# Altium PCB PM-1_motorDriverModule.PcbDoc
Units mm, origin at the board's own origin, x right, y up, seen from the top; angles counter-clockwise.
Board outline 87 x 53.25 mm, 2 copper layers (Top Layer, Bottom Layer); 82 components, 55 nets, 281 pads, 281 vias.
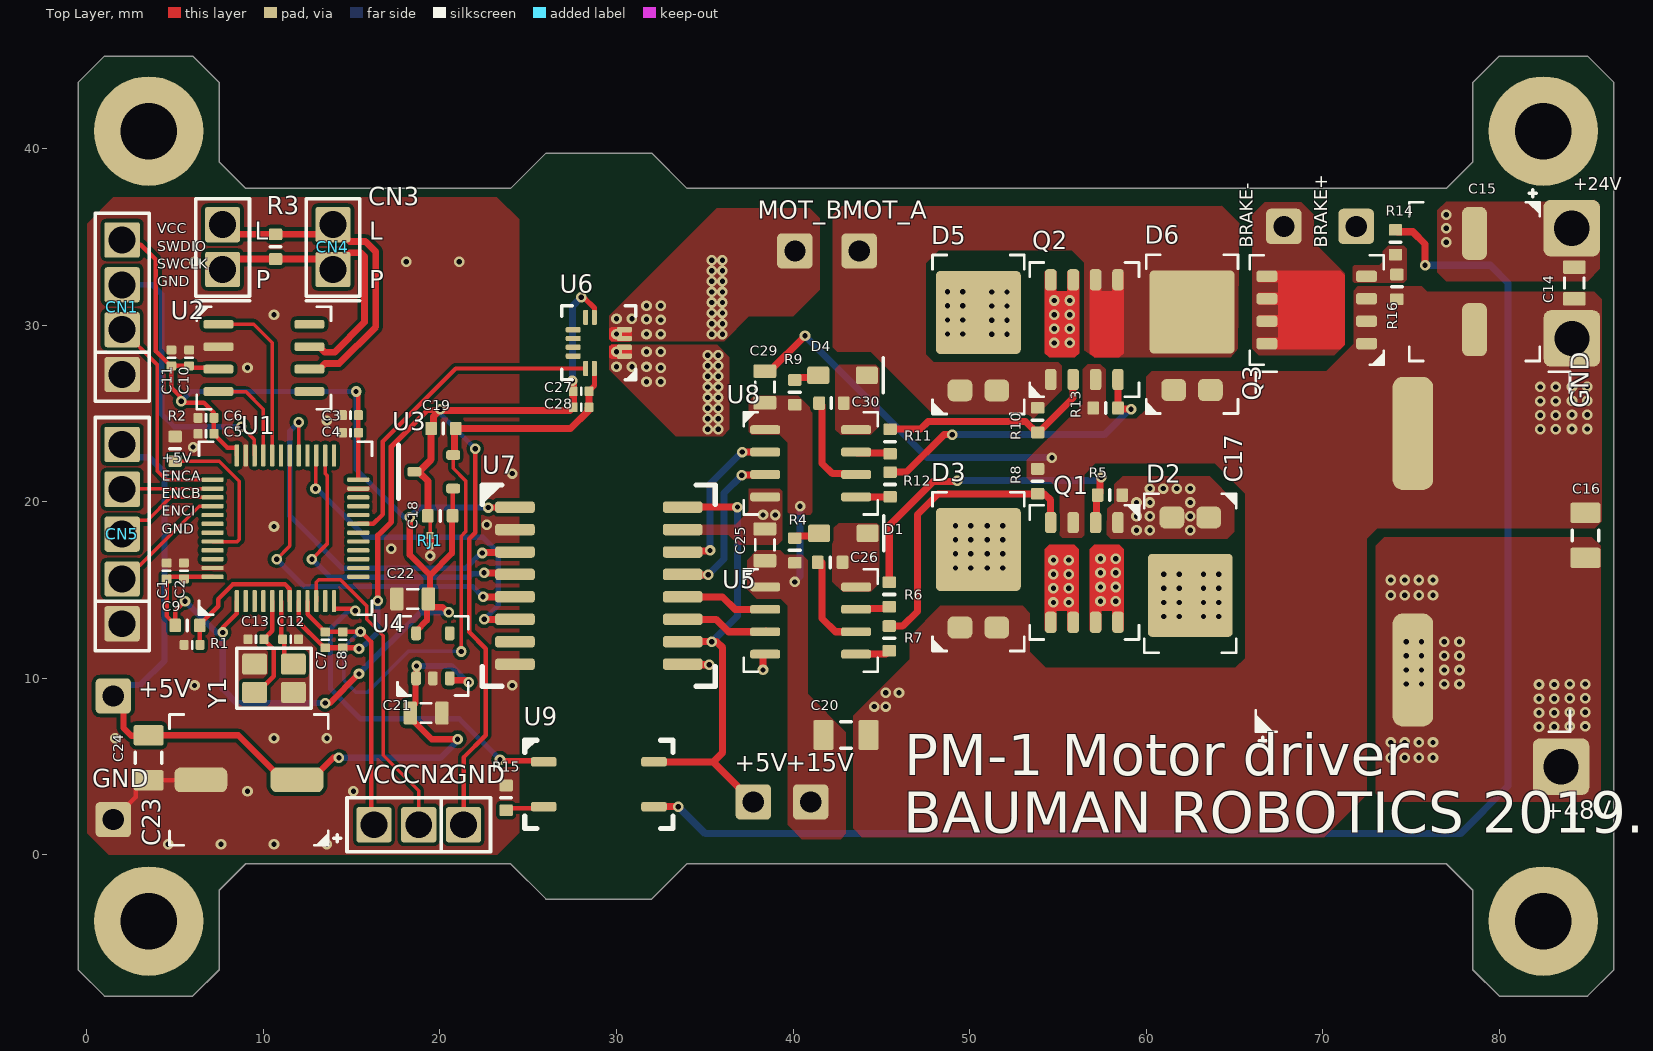
[diagram p0: Top Layer view]
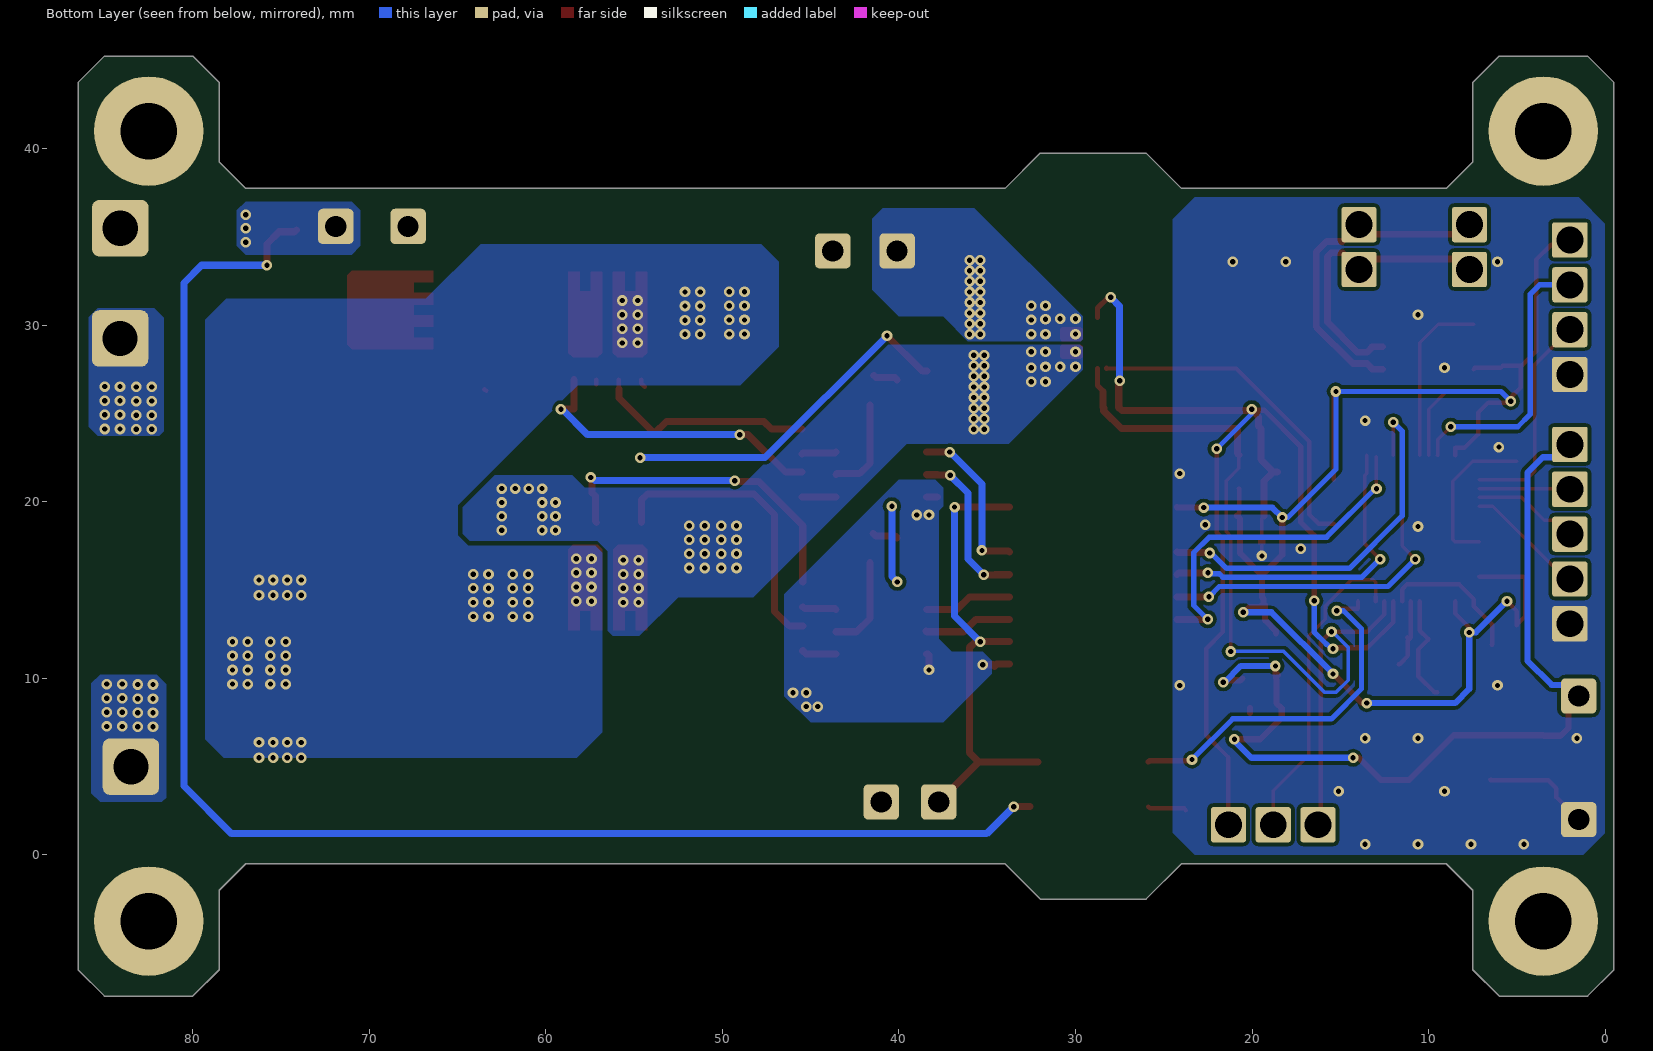
[diagram p1: Bottom Layer view, seen from below]
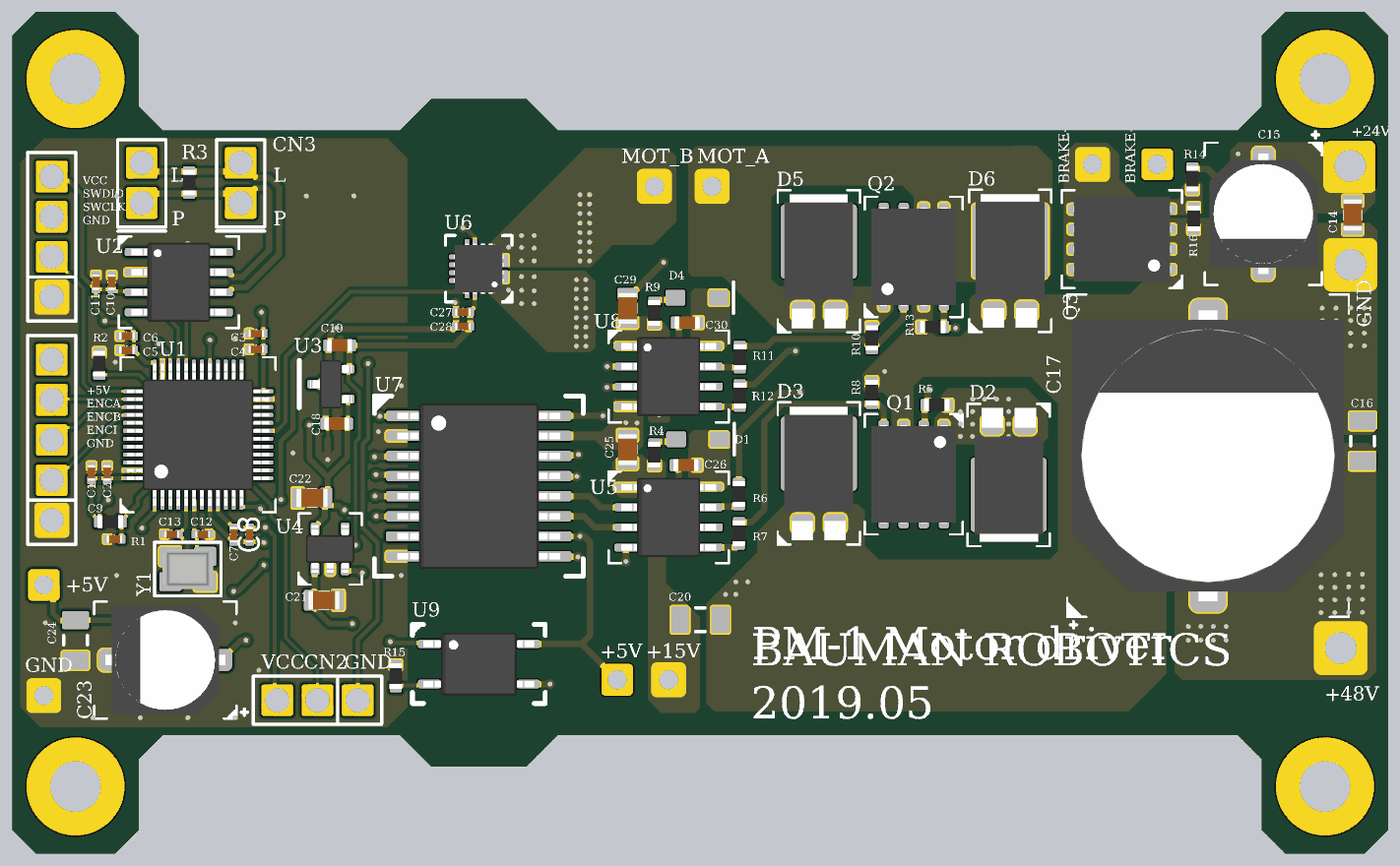
[diagram p2: 3D render of the assembled board from above, using the file's embedded part models]

## Layer stack, top to bottom
Top Solder: solder mask 0.0102, Solder Resist, Dk 3.5
Top Layer: signal copper 0.0356
Dielectric 1: dielectric 0.32, FR-4, Dk 4.8
Bottom Layer: signal copper 0.0356
Bottom Solder: solder mask 0.0102, Solder Resist, Dk 3.5

## Board outline
-0.5,-6.5 1,-8 6,-8 7.5,-6.5 7.5,-2 9,-0.5 24,-0.5 26,-2.5 32,-2.5 34,-0.5 77,-0.5 78.5,-2 78.5,-6.5 80,-8 85,-8 86.5,-6.5 86.5,43.75 85,45.25 80,45.25 78.5,43.75 78.5,39.25 77,37.75 34,37.75 32,39.75 26,39.75 24,37.75 9,37.75 7.5,39.25 7.5,43.75 6,45.25 1,45.25 -0.5,43.75

## Design rules (kind name [scope] priority, off if disabled: settings)
BoardOutlineClearance [All] p1: gap=0.5 ignorepadtopadclearanceinfootprint=FALSE except(0: Arc-SplitContinuation Track-SplitContinuation SMDPad-SplitContinuation THPad-SplitContinuation Via-SplitContinuation Fill-SplitContinuation Poly-SplitContinuation Region-SplitContinuation Text-SplitContinuation)
Clearance [All] p1: gap=0.2 ignorepadtopadclearanceinfootprint=FALSE except(0: Arc-Text Arc-Hole Track-Text Track-Hole SMDPad-Text SMDPad-Hole THPad-Text THPad-Hole Via-Text Via-Hole Fill-Text Fill-Hole Poly-Text Poly-Hole Region-Text Region-Hole Text-Text Text-Hole)
ComponentClearance ComponentClearance_1 [All] p1: gap=0.254 collisioncheckmode=3 verticalgap=0.254 showdistances=FALSE
ComponentClearance [HasFootprint('SHORT10_8MIL-FP')] p2: gap=0 collisioncheckmode=3 verticalgap=0 showdistances=FALSE
DiffPairsRouting DiffPair_DiffPairsRouting [InDifferentialPair ('CAN')] p1: maxlimit=0.254 minlimit=0.254 mostfreqgap=0.254 toplayer_minwidth=0.381 toplayer_maxwidth=0.381 toplayer_prefwidth=0.381 bottomlayer_minwidth=0.381 bottomlayer_maxwidth=0.381 bottomlayer_prefwidth=0.381 maxuncoupledlength=12.7
DiffPairsRouting [All] p2: maxlimit=0.254 minlimit=0.254 mostfreqgap=0.254 toplayer_minwidth=0.381 toplayer_maxwidth=0.381 toplayer_prefwidth=0.381 bottomlayer_minwidth=0.381 bottomlayer_maxwidth=0.381 bottomlayer_prefwidth=0.381 maxuncoupledlength=12.7
HoleSize [All] p1: absolutevalues=TRUE maxlimit=150 minlimit=0.025 maxpercent=80.000 minpercent=20.000
HoleToHoleClearance [All] p1: gap=0.2 allowstackedmicrovias=TRUE
MatchedLengths DiffPair_MatchedLengths [InDifferentialPair ('CAN')] p1: tolerance=1 checknetsindiffpair=FALSE checkdiffpairvsdiffpair=TRUE checkxsignals=TRUE checkothers=TRUE
MinimumAnnularRing [All] p1: minimumring=0.15
MinimumSolderMaskSliver [All] p1: minsoldermaskwidth=0.15
PolygonConnect [All] p1: connectstyle=Direct reliefconductorwidth=0.254 reliefentries=4 polygonreliefangle="90 Angle" airgapwidth=0.254
RoutingVias [All] p1: holewidth=0.3 width=0.6 viastyle="Through Hole" minholewidth=0.3 minwidth=0.6 maxholewidth=2 maxwidth=3
ShortCircuit ShortCircuit_1 [InNet('ADGND') vs InNet('GND')] p1: allowed=TRUE
ShortCircuit [All] p2: allowed=FALSE
SilkToSilkClearance [All] p1 off: silktosilkclearance=0.254
SolderMaskExpansion [All] p1: expansion=0.1
Width [All] p1: maxlimit=4 minlimit=0.2 preferedwidth=0.2 minimp=50.000000 maximp=50.000000 favimp=50.000000
23 further rules are at their usual default settings.

## Classes and differential pairs
component class 3_MotorDriver: BRAKE+ BRAKE- C25 C26 C27 C28 C29 C30 D1 D2 D3 D4 D5 D6 MOT_A MOT_B Q1 Q2 Q3 R4 R5 R6 R7 R8 R9 R10 R11 R12 R13 R14 R15 R16 U5 U6 U7 U8 U9
component class 1_MCU: C1 C2 C3 C4 C5 C6 C7 C8 C9 C10 C11 C12 C13 CN1 CN2 CN3 CN4 CN5 R1 R2 R3 U1 U2 Y1
component class 2_Power: +5V +15V +24V +48V C14 C15 C16 C17 C18 C19 C20 C21 C22 C23 C24 GND RJ1 U3 U4
differential pair CAN: +CAN_P -CAN_N

## Components (designator, comment, footprint, x,y, rotation, side; value= is the part's Value field where it differs from the comment)
+5V "+5VinP" POWERHOLE-LP#1 37.75,3 r0 top (schematic designator PTH4)
+5V "+5Vin" POWERHOLE-LP#1 1.5,9 r0 top (schematic designator PTH6)
+15V "+15Vin" POWERHOLE-LP#2 41,3.027 r0 top (schematic designator PTH3)
+24V "+24Vin" POWERHOLE 84.1,35.5 r0 top (schematic designator PTH2)
+48V "+48Vin" POWERHOLE 83.5,5 r0 top (schematic designator PTH1)
BRAKE+ "BrakeA" POWERHOLE-LP#1 71.9,35.6 r180 top (schematic designator PTH10)
BRAKE- "BrakeB" POWERHOLE-LP#1 67.8,35.6 r180 top (schematic designator PTH11)
C1 "SC1U10V2KX" CAPC0402(1005)60_L 4.515,16.085 r270 top
C2 "SC1U10V2KX" CAPC0402(1005)60_L 5.501,16.085 r270 top
C3 "SC1U10V2KX" CAPC0402(1005)60_L 14.933,24.911 r0 top
C4 "SC100N50V2KX" CAPC0402(1005)60_L 14.933,23.911 r0 top
C5 "SC100N50V2KX" CAPC0402(1005)60_L 6.75,23.85 r0 top
C6 "SC100N50V2KX" CAPC0402(1005)60_L 6.75,24.75 r0 top
C7 "SC100N50V2KX" CAPC0402(1005)60_L 13.5,12.18 r90 top
C8 "SC1U10V2KX" CAPC0402(1005)60_L 14.5,12.18 r90 top
C9 "SC100N50V2KX" CAPC0402(1005)60_L 5.962,11.894 r0 top
C10 "SC1U10V2KX" CAPC0402(1005)60_L 5.79,28.15 r270 top
C11 "SC100N50V2KX" CAPC0402(1005)60_L 4.79,28.15 r270 top
C12 "SC12P50V2JN" CAPC0402(1005)33_L 11.541,12.21 r180 top
C13 "SC12P50V2JN" CAPC0402(1005)33_L 9.58,12.21 r0 top
C14 "SC1U50V4KX" CAPC0805(2012)145_L 84.25,32.4 r90 top
C15 "SA100U35VD8K" CAPAE(D8)7666X80L 78.6,32.475 r270 top
C16 "SC1U100V6KX" CAPC1206(3216) 84.88,18.1 r270 top
C17 "SA470U63VJ16K" CAPAE184170X170L 75.105,17.175 r90 top
C18 "SC100N100V3KX" CAPC0603(1608)100_L 20.016,19.204 r0 top
C19 "SC100N100V3KX" CAPC0603(1608)100_L 20.199,24.15 r0 top
C20 "SC22U25V6KX" CAPC1206(3216) 43,6.796 r180 top
C21 "SC1U16V4KX" CAPC0805(2012)145_L 19.212,8.032 r180 top
C22 "SC1U16V4KX" CAPC0805(2012)145_L 18.459,14.5 r0 top
C23 "SA100U35VD8K" CAPAE(D8)7666X80L 9.18,4.25 r180 top
C24 "SC47U10V6KX" CAPC1206(3216) 3.5,5.5 r90 top
C25 "SC1U50V4KX" CAPC0805(2012)145_L 38.4,17.561 r270 top
C26 "SC100N100V3KX" CAPC0603(1608)100_L 42.1,16.572 r0 top
C27 "SC1U10V2KX" CAPC0402(1005)60_L 28,26.257 r0 top
C28 "SC100N50V2KX" CAPC0402(1005)60_L 28,25.356 r0 top
C29 "SC1U50V4KX" CAPC0805(2012)145_L 38.4,26.497 r270 top
C30 "SC100N100V3KX" CAPC0603(1608)100_L 42.175,25.591 r0 top
CN1 "4 18awg wires" 4PHEADERS-2D54 2,27.21 r90 top
CN2 "3 18awg wires" 3PHEADERS-2D54 21.34,1.706 r180 top
CN3 "2 18awg wires" 2PHEADERS-2D54 7.689,33.159 r90 top
CN4 "2 18awg wires" 2PHEADERS-2D54 13.939,33.159 r90 top
CN5 "5 18awg wires" 5PHEADERS-2D54 2,13.09 r90 top
D1 "MBR130LSFT1G" SOD-123LF 42.85,18.215 r180 top
D2 "V8PL6-M3" DFN442P610X120-3L 62.5,16.25 r270 top
D3 "V8PL6-M3" DFN442P610X120-3L 50.5,15.75 r90 top
D4 "MBR130LSFT1G" SOD-123LF 42.803,27.164 r180 top
D5 "V8PL6-M3" DFN442P610X120-3L 50.5,29.175 r90 top
D6 "V8PL6-M3" DFN442P610X120-3L 62.6,29.2 r90 top
GND "GNDP" POWERHOLE 84.119,29.25 r0 top (schematic designator PTH5)
GND "GND" POWERHOLE-LP#1 1.5,2 r0 top (schematic designator PTH7)
MOT_A "MotorB" POWERHOLE-LP#1 43.75,34.211 r0 top (schematic designator PTH9)
MOT_B "MotorA" POWERHOLE-LP#1 40.103,34.211 r0 top (schematic designator PTH8)
Q1 "IPG20N10S4L-22" PG-TDSON-8-4 56.5,16 r270 top
Q2 "IPG20N10S4L-22" PG-TDSON-8-4 56.5,29.75 r90 top
Q3 "BSC100N06LS3GATMA1" PG-TDSON-8-1 69.663,30.865 r180 top
R1 "10K3J" RESC0603(1608)_L 5.7,13 r180 top
R2 "10K3J" RESC0603(1608)_L 5,23 r270 top
R3 "120R3F" RESC0603(1608)_L 10.689,34.449 r270 top
R4 "5D6R3F" RESC0603(1608)_L 40.1,17.245 r90 top
R5 "10KR3J" RESC0603(1608)_L 57.95,20.38 r180 top
R6 "5D6R3F" RESC0603(1608)_L 45.45,14.75 r90 top
R7 "5D6R3F" RESC0603(1608)_L 45.45,12.263 r90 top
R8 "10KR3J" RESC0603(1608)_L 53.85,21.162 r270 top
R9 "5D6R3F" RESC0603(1608)_L 40.1,26.2 r90 top
R10 "10KR3J" RESC0603(1608)_L 53.857,24.624 r270 top
R11 "5D6R3F" RESC0603(1608)_L 45.498,23.414 r90 top
R12 "5D6R3F" RESC0603(1608)_L 45.5,20.98 r90 top
R13 "10KR3J" RESC0603(1608)_L 57.705,25.315 r0 top
R14 "100R3F" RESC0603(1608)_L 74.125,34.7 r270 top
R15 "330R3F" RESC0603(1608)_L 23.749,3.231 r270 top
R16 "10KR3J" RESC0603(1608)_L 74.2,32.175 r90 top
RJ1 "SHORT10_8MIL" SHORT10_8MIL-FP 19.447,17.8 r90 top net-tie value=0
U1 "STM32F103C6T7A" TSQFP50P900X900X160-48L 11.25,18.5 r90 top
U2 "SN65HVD232" SOIC127P600X175-8L 10.03,28.15 r0 top
U3 "REF3030AIDBZR" SOT95P237X112-3L 19.65,21.7 r180 top
U4 "LP5907MFX" SOT95P280X145-5L 19.6,11.275 r90 top
U5 "IRS21867S" SOIC127P600X175-8L 41,13.275 r0 top
U6 "ACS711EEXLT-31AB-T" ACS711EX 29,29 r180 top locked
U7 "ADUM1400BRWZ" SOIC127P1030X265-16L 29,15.25 r0 top locked
U8 "IRS21867S" SOIC127P600X175-8L 41,22.181 r0 top
U9 "TLP175A" SOP254P700X220-4L 29,4 r0 top locked
Y1 "FA-12824.0000MF10Z-W3" QRTZ-12MHZ 10.6,10.005 r180 top

## Footprints (in the part's own frame and the unit in brackets; to place one, negate y for a bottom-side part, rotate by r counter-clockwise, add the part's x,y. Pads: shape width x height; smd on the part's side, far side on the other; paste and mask are expansions set on the pad)
2PHEADERS-2D54 [mm]
  rrect15% 2x2 hole 1.524: 1(0,0) 2(2.54,0)
  silkscreen extent -1.78,-1.52 4,1.52
3PHEADERS-2D54 [mm]
  rrect15% 2x2 hole 1.524: 1(0,0) 2(2.54,0) 3(5.08,0)
  silkscreen extent -1.52,-1.52 6.6,1.52
4PHEADERS-2D54 [mm]
  rrect15% 2x2 hole 1.524: 1(0,0) 2(2.54,0) 3(5.08,0)
  rrect10% 2x2 hole 1.524: 4(7.62,0)
  silkscreen extent -1.52,-1.52 9.14,1.52
5PHEADERS-2D54 [mm]
  rrect15% 2x2 hole 1.524: 1(0,0) 2(2.54,0) 3(5.08,0)
  rrect10% 2x2 hole 1.524: 4(7.62,0) 5(10.16,0)
  silkscreen extent -1.52,-1.52 11.68,1.52
ACS711EX [mm] "QFN,"
  rrect50% 0.85x0.3 smd: 1(-1.45,0.75) 2(-1.45,0.25) 3(-1.45,-0.25) 4(-1.45,-0.75) 7(1.45,-0.75) 8(1.45,-0.25) 9(1.45,0.25) 10(1.45,0.75)
  rrect50% 0.3x0.85 smd: 5(0.25,-1.45) 6(0.75,-1.45) 11(0.75,1.45) 12(0.25,1.45)
  Top Layer region: -0.7,-0.9 -0.6,-0.8 -0.6,-0.2 -0.7,-0.1 -1.775,-0.1 -1.875,-0.2 -1.875,-0.8 -1.775,-0.9
  Top Layer region: -0.7,0.1 -0.6,0.2 -0.6,0.8 -0.7,0.9 -1.775,0.9 -1.875,0.8 -1.875,0.2 -1.775,0.1
  silkscreen extent -2.1,-2.1 2.1,2.1, body extent -1.58,-1.58 1.58,1.58, height 0.8
CAPAE184170X170L [mm] "Aluminum Electrolytic Capacitor, Body 17,00x17,00x17,00mm, IPC High Density"
  rrect50% 6.4x2.3 smd: 1(-6.7,0) 2(6.7,0)
  silkscreen extent -10.9,-8.9 10.2,8.9, body extent -9.2,-8.6 9.2,8.6, height 17
CAPAE(D8)7666X80L [mm] "Aluminum Electrolytic Capacitor, Body 6,60x6,60x8,00mm, IPC High Density"
  rrect50% 3x1.4 smd: 1(-2.725,0) 2(2.725,0)
  silkscreen extent -5.2,-3.7 4.5,3.7, body extent -3.8,-3.4 3.8,3.4, height 8
CAPC0402(1005)33_L [mm]
  rrect25% 0.5x0.55 smd: 1(-0.45,0) 2(0.45,0)
  silkscreen extent 0,-0.2 0,0.2, body extent -0.5,-0.25 0.5,0.25, height 0.55
CAPC0402(1005)60_L [mm]
  rrect25% 0.5x0.55 smd: 1(-0.45,0) 2(0.45,0)
  silkscreen extent 0,-0.2 0,0.2, body extent -0.5,-0.25 0.5,0.25, height 0.6
CAPC0603(1608)100_L [mm]
  rrect25% 0.66x0.76 smd: 1(-0.7,0) 2(0.7,0)
  silkscreen extent 0,-0.3 0,0.3, body extent -0.8,-0.4 0.8,0.4, height 0.95
CAPC0805(2012)145_L [mm]
  rrect25% 0.76x1.3 smd: 1(-0.9,0) 2(0.89,0)
  silkscreen extent -0.3,-0.55 0.3,0.55, body extent -1,-0.6 1,0.6, height 1.45
CAPC1206(3216) [mm] "Chip Capacitor, 2-Leads, Body 3,20x1,60mm, IPC High Density"
  rrect20% 1.15x1.7 smd: 1(-1.275,0) 2(1.275,0)
  silkscreen extent -0.3,-0.75 0.3,0.75, body extent -1.7,-0.9 1.7,0.9, height 1.6
DFN442P610X120-3L [mm] "DFN, 3-Leads, Body 4,30x6,10mm, Pitch 4,42mm, IPC High Density"
  rrect50% 1.25x1.4 smd: 1(-2.865,1.04) 2(-2.865,-1.04)
  rrect10% 4.7x4.8 smd: 3(1.55,0)
  silkscreen extent -4.2,-2.6 4.8,2.6, body extent -3.94,-2.16 4.52,2.19, height 1.2
PG-TDSON-8-1 [mm] "SON, 8-Leads, Body 5,15x5,90mm, Pitch 1,27mm, IPC High Density"
  rrect50% 1.2x0.65 smd: 1(-2.825,1.905) 2(-2.825,0.635) 3(-2.825,-0.635) 4(-2.825,-1.905) 5(2.825,-1.905) 6(2.825,-0.635) 7(2.825,0.635) 8(2.825,1.905)
  Top Layer region: 3.275,0.96 -1.325,0.96 -1.575,0.71 -1.575,-0.72 -1.325,-0.97 3.275,-0.97 3.275,-0.309 2.175,-0.309 2.175,0.309 3.275,0.309
  Top Layer region: 3.275,2.23 -1.325,2.23 -1.575,1.98 -1.575,0.55 -1.325,0.3 3.275,0.3 3.275,0.961 2.175,0.961 2.175,1.579 3.275,1.579
  Top Layer region: 3.275,-0.311 -1.325,-0.311 -1.575,-0.561 -1.575,-1.98 -1.325,-2.23 3.275,-2.23 3.275,-1.58 2.175,-1.58 2.175,-0.959 3.275,-0.959
  silkscreen extent -3.8,-3.1 3.8,3.1, body extent -3.1,-2.68 3.1,2.68, height 1
PG-TDSON-8-4 [mm] "SON, 8-Leads, Body 5,15x5,90mm, Pitch 1,27mm, IPC High Density"
  rrect50% 1.2x0.65 smd: 1(-2.825,1.905) 2(-2.825,0.635) 3(-2.825,-0.635) 4(-2.825,-1.905) 5(2.825,-1.905) 6(2.825,-0.635) 7(2.825,0.635) 8(2.825,1.905)
  Top Layer region: 3.275,-0.311 -1.325,-0.311 -1.575,-0.561 -1.575,-1.98 -1.325,-2.23 3.275,-2.23 3.275,-1.58 2.175,-1.58 2.175,-0.959 3.275,-0.959
  Top Layer region: 3.275,2.23 -1.325,2.23 -1.575,1.98 -1.575,0.55 -1.325,0.3 3.275,0.3 3.275,0.961 2.175,0.961 2.175,1.579 3.275,1.579
  silkscreen extent -3.8,-3.1 3.8,3.1, body extent -3.1,-2.68 3.1,2.68, height 1
POWERHOLE [mm]
  rrect25% 3.2x3.2 hole 2: 1(0,0)
POWERHOLE-LP#1 [mm]
  rrect25% 2x2 hole 1.2: 1(0,0)
POWERHOLE-LP#2 [mm]
  rrect25% 2x2 hole 1.2: 1(0,-0.027)
QRTZ-12MHZ [mm]
  rrect20% 1.4x1.2 smd: 1(-1.1,-0.8) 2(1.1,-0.8) 3(1.1,0.8) 4(-1.1,0.8)
  silkscreen extent -2.1,-1.7 2.1,1.7, body extent -1.6,-1.25 1.6,1.25, height 0.8
RESC0603(1608)_L [mm]
  rrect25% 0.66x0.76 smd: 1(-0.7,0) 2(0.7,0)
  silkscreen extent 0,-0.3 0,0.3, body extent -0.8,-0.4 0.8,0.4, height 0.45
SHORT10_8MIL-FP [mm]
  rect 0.4x0.4 smd paste-0.4 mask+0.102: 1(-0.3,0) 2(0.3,0)
  Top Layer region: -0.2,0.2 -0.2,-0.2 0.2,-0.2 0.2,0.2
  Top Layer region: -0.2,0.3
SOD-123LF [mm] "SODFL, 2-Leads, Body 1,65x3,60mm, IPC High Density"
  rrect25% 1.25x1 smd: 1(-1.375,0) 2(1.375,0)
  silkscreen extent -2.3,-1 -2.3,1, body extent -1.45,-0.9 1.45,0.9, height 0.98
SOIC127P600X175-8L [mm] "SOIC, 8-Leads, Body 4,90x3,90mm, Pitch 1,27mm, IPC High Density"
  rrect50% 1.7x0.5 smd: 1(-2.575,1.905) 2(-2.575,0.635) 3(-2.575,-0.635) 4(-2.575,-1.905) 5(2.575,-1.905) 6(2.575,-0.635) 7(2.575,0.635) 8(2.575,1.905)
  silkscreen extent -3.8,-2.9 3.8,2.9, body extent -3,-2.5 3,2.5, height 1.75
SOIC127P1030X265-16L [mm] "SOIC, 16-Leads, Body 10,30x7,50mm, Pitch 1,27mm, IPC High Density"
  rrect50% 2.25x0.65 smd: 1(-4.75,4.445) 2(-4.75,3.175) 3(-4.75,1.905) 4(-4.75,0.635) 5(-4.75,-0.635) 6(-4.75,-1.905) 7(-4.75,-3.175) 8(-4.75,-4.445) 9(4.75,-4.445) 10(4.75,-3.175) 11(4.75,-1.905) 12(4.75,-0.635) 13(4.75,0.635) 14(4.75,1.905) 15(4.75,3.175) 16(4.75,4.445)
  silkscreen extent -6.6,-5.7 6.6,5.7, body extent -5.15,-5.25 5.15,5.25, height 2.65
SOP254P700X220-4L [mm] "SOP, 4-Leads, Body 3,75x4,60mm, Pitch 2,54mm, IPC High Density"
  rrect50% 1.45x0.55 smd: 1(-3.125,1.27) 2(-3.125,-1.27) 3(3.125,-1.27) 4(3.125,1.27)
  silkscreen extent -4.2,-2.5 4.2,2.5, body extent -3.5,-2 3.5,2, height 2.2
SOT95P237X112-3L [mm] "SOT23, 3-Leads, Body 2,92x2,37mm, Pitch 0,95mm, IPC High Density"
  rrect50% 0.8x0.55 smd: 1(-1.1,0.95) 2(-1.1,-0.95) 3(1.1,0)
  silkscreen extent 2,-1.5 2,1.5, body extent -1.32,-1.52 1.32,1.52, height 1.12
SOT95P280X145-5L [mm] "SOT23, 5-Leads, Body 2,90x2,80mm, Pitch 0,95mm, IPC High Density"
  rrect50% 0.8x0.55 smd: 1(-1.275,0.95) 2(-1.275,0) 3(-1.275,-0.95) 4(1.275,-0.95) 5(1.275,0.95)
  silkscreen extent -2.25,-2 2.25,2, body extent -1.5,-1.53 1.5,1.53, height 1.45
TSQFP50P900X900X160-48L [mm] "TSQFP, 48-Leads, Body 7,00x7,00mm, Pitch 0,50mm, IPC High Density"
  rrect50% 1.25x0.25 smd: 1(-4.125,2.75) 2(-4.125,2.25) 3(-4.125,1.75) 4(-4.125,1.25) 5(-4.125,0.75) 6(-4.125,0.25) 7(-4.125,-0.25) 8(-4.125,-0.75) 9(-4.125,-1.25) 10(-4.125,-1.75) 11(-4.125,-2.25) 12(-4.125,-2.75) 25(4.125,-2.75) 26(4.125,-2.25) 27(4.125,-1.75) 28(4.125,-1.25) 29(4.125,-0.75) 30(4.125,-0.25) 31(4.125,0.25) 32(4.125,0.75) 33(4.125,1.25) 34(4.125,1.75) 35(4.125,2.25) 36(4.125,2.75)
  rrect50% 0.25x1.25 smd: 13(-2.75,-4.125) 14(-2.25,-4.125) 15(-1.75,-4.125) 16(-1.25,-4.125) 17(-0.75,-4.125) 18(-0.25,-4.125) 19(0.25,-4.125) 20(0.75,-4.125) 21(1.25,-4.125) 22(1.75,-4.125) 23(2.25,-4.125) 24(2.75,-4.125) 37(2.75,4.125) 38(2.25,4.125) 39(1.75,4.125) 40(1.25,4.125) 41(0.75,4.125) 42(0.25,4.125) 43(-0.25,4.125) 44(-0.75,4.125) 45(-1.25,4.125) 46(-1.75,4.125) 47(-2.25,4.125) 48(-2.75,4.125)
  silkscreen extent -4.9,-4.9 4.9,4.9, body extent -4.5,-4.5 4.5,4.5, height 1.6

## Part data
+5V +5V +15V BRAKE+ BRAKE- GND MOT_A MOT_B: library part PTH-1D2M, "1.2mm hole 2mm pad", Hole diameter (mm)=2.5, Pad diameter (mm)=5
+24V +48V GND: library part PTH-2M, "2mm hole 3.5mm pad", Hole diameter (mm)=2.5, Pad diameter (mm)=5
C1 C2 C3 C8 C10 C27: library part CAP(0402)1UF10V, "CAP 1uF 10V ±10% 0402 (1005 Metric) Thickness 0.6mm SMD"
C4 C5 C6 C7 C9 C11 C28: library part CAP(0402)100nF50V, "CAP 100nF 50V ±10% 0402 (1005 Metric) Thickness 0.6mm SMD"
C12 C13: library part CAP12pF, "CAP 12pF 50V ±5% 0402 (1005 Metric) Thickness 0.33mm SMD"
C14 C25 C29: library part CAP(0805)1UF50V, "CAP 1uF 50V ±10% 0805(1610 Metric) Thickness 1.2mm SMD"
C15 C23: library part CAP(D8)100UF35V, "CAP 100uF 35V ±10% D8 Thickness 7.7mm SMD"
C16: library part CAP(1206)1UF100V, "CAP 1uF 100V ±10% 1206(3216 Metric) Thickness 1.8mm SMD"
C17: library part CAP(J16)470UF63V, "EEVFK1J471M CAP 470uF 63V ±10% J16 Thickness 17mm SMD"
C18 C19 C26 C30: library part CAP(0603)100nF100V, "CAP 100nF 100V ±10% 0603(1608 Metric) Thickness 1mm SMD"
C20: library part CAP(1206)22UF25V, "CAP 22uF 25V ±10% 1206(3216 Metric) Thickness 1.8mm SMD"
C21 C22: library part CAP(0805)1UF16V, "CAP 1uF 16V ±10% 0805(1610 Metric) Thickness 0.6mm SMD"
C24: library part CAP(1206)47UF10V, "CAP 47uF 10V ±10% 1206(3216 Metric) Thickness 1.6mm SMD"
CN1: library part 4PIN-CN, "4 holes for 18awg wire", Manufacturer=JST, Package Reference=JST-BM04B-GHS-TBT, Datasheet URL=http://www.jst-mfg.com/product/pdf/eng/eGH.pdf
CN2: library part 3PIN-CN, "3 holes for 18awg wire", Manufacturer=JST, Package Reference=JST-BM04B-GHS-TBT, Datasheet URL=http://www.jst-mfg.com/product/pdf/eng/eGH.pdf
CN3 CN4: library part 2PIN-CN, "2 holes for 18awg wire", Manufacturer=JST, Package Reference=JST-BM04B-GHS-TBT, Datasheet URL=http://www.jst-mfg.com/product/pdf/eng/eGH.pdf
CN5: library part 5PIN-CN, "5 holes for 18awg wire", Manufacturer=JST, Package Reference=JST-BM04B-GHS-TBT, Datasheet URL=http://www.jst-mfg.com/product/pdf/eng/eGH.pdf
D1 D4: library part DIOD-MBR130, "1? 30? [SOD-123FL] , RoHS, Tape and Reel", Manufacturer=Rohm, Package Reference=ROHM-1SS400CSFH, Datasheet URL=https://www.rohm.com/datasheet/1SS400CSFH/1ss400csfht2ra-e
D2 D3 D5 D6: library part VISH-V8PL6-M3, "High Current Density Surface Mount / Trench MOS Barrier Schottky Rectifier / Ultra Low VF = 0.34 V at IF = 4 A", ComponentLink1Description="Manufacturer URL", ComponentLink1URL=http://www.onsemi.com/, ComponentLink2Description=Datasheet, ComponentLink2URL=http://www.onsemi.cn/pub_link/Collateral/DAN222M3-D.PDF, ComponentLink3Description="Package Specification", ComponentLink3URL=http://www.onsemi.com/pub_link/Collateral/631AA.PDF, Configuration=Single, DatasheetVersion="Rev. 6", IF Max (A)=0.1, Mounting Technology="Surface Mount", PackageDescription="3-Pin Small Outline Transistor, Body 1.2 x 0.8 mm, Pitch 0.4 mm", PackageReference=SOT-723-3-631AA-01, PackageVersion="Rev. D, 08/2009", Packing="Tape and Reel", RoHS=TRUE, trr Max (ns)=4
Q1 Q2: library part INF_IPG20N06S4L-26, "OptiMOS™-T2 Power-Transistor V DS 100 V / R DS(on) max 22 / ID 20 A"
Q3: library part NEMOS-BSC100N06L, "100 V N-Channel NexFET™ Power MOSFETs"
R1 R2 R5 R8 R10 R13 R16: library part RES0(0603)_10K, "10K 0.1W 5% 0603 (1608 Metric)  SMD"
R3: library part RES0(0603)_120R, "100R 0.1W 1% 0603 (1608 Metric)  SMD"
R4 R6 R7 R9 R11 R12: library part RES0(0603)_5R6, "5.6R 0.1W 1% 0603 (1608 Metric)  SMD"
R14: library part RES0(0603)_100R, "100R 0.1W 1% 0603 (1608 Metric)  SMD"
R15: library part RES0(0603)_330R, "330R 0.1W 1% 0603 (1608 Metric)  SMD"
RJ1: library part SHORT*, "Net tie (10x8mil)", Case/Package=10x8mil, Resistance=0, Tolerance=5%, Mounting Technology=SMT, Pins=2
U1: "ARM® Cortex®-M3 STM32F1 Microcontroller IC 32-Bit 72MHz 32KB 48-LFQP (7x7)", Case/Package=UFQFN-48, Operating Frequency(F) (Processor speed) (MHz)=80, Package Description="48-Pin Ultra Thin Fine Pitch Quad Flat No-Lead, 7 x 7 x 0.6 mm Body, 0.5 mm Pitch, Exposed Pad", Package Reference=UFQFPN48, Supply Voltage(Vcc) min (V)=2, ComponentLink1Description="Manufacturer URL", ComponentLink1URL=http://www.st.com/, ComponentLink2Description=Datasheet, ComponentLink2URL=http://www.st.com/st-web-ui/static/active/en/resource/technical/document/datasheet/CD00161566.pdf, Core="ARM Cortex-M4", FLASH Size (Prog) (kB)=512, I/Os=38, Internal RAM Size (kB)=160, Mounting Technology="Surface Mount", Packing="Tape and Reel", RoHS Compliant=Yes
U2: library part CAN_SN65HVD232D, "IC CAN TRANSCEIVER 8-SOIC"
U3: library part REF-REF3030, "3V 25mA 0.2%"
U4: library part LP5907V3.3, "3.3V 250mA"
U5 U8: library part MOSDRV_IRS21867S
U6: library part ACS711EX, "High Accuracy, Hall-Effect Based Current Sensor / IC in High Isolation QFN Package"
U7: library part ISOL-ADUM1400, "ISOLATOR 4ch in"
U9: library part OPTO-TLP175A
Y1: library part XTAL-1-3-4, "Crystal, 24 MHz, +/- 10 ppm, -20 to 75 degC, 4-Pin SMD, RoHS, Tape and Reel", Case/Package=SMD/SMT, ESR (Equivalent Series Resistance)=80R, Frequency=24MHz, Frequency Stability=10ppm, Load Capacitance=12pF, Max Operating Temperature=75°C, Min Operating Temperature=-20°C, Package Quantity=250, Frequency Tolerance=10ppm, Height=0.02inch, Lead Free="Lead Free", Length=0.079inch, Mount="Surface Mount", Mounting Technology=SMT, Number of Pins=4, Packaging="Tape and Reel", Radiation Hardening=No, RoHS Compliant=Yes, Termination=SMD/SMT, Tolerance=10ppm, Width=0.063inch

## Free pads (board coordinates)
  round 6.2 hole 3.2: 1(3.5,-3.75) 2(3.5,41) 3(82.5,41) 4(82.5,-3.75)

## Via types
v1: diameter 0.6/0.6 (per signal layer), hole 0.3, Top Layer to Bottom Layer, tented both sides, 213 vias
v2: diameter 0.6, hole 0.3, Top Layer to Bottom Layer, tented both sides, 68 vias

## Nets (pads, with @x,y where several pads share a name; then routed paths per layer and width w, separated by ;. In a path a pad name is that pad's centre, name@x,y a point inside that pad or via, vN(x,y) a via of type N, cw(c..) or ccw(c..) an arc to the next point about the centre after c; other vN are vias at no path point)
A_CURRENT: U1.19 U6.11 | length 18.9
  Top Layer w0.25: U1.19 16.229,18.75 16.764,19.285 16.764,23.416 20.898,27.55 U6.11
  Top Layer w0.3: U6.11 U6.11@28.25,27.559
AGND: C7.1 C8.1 C18.1 C19.1 C27.1 C28.1 CN2.1 RJ1.2 U1.8 U3.3 U6.5 | length 70.1
  Top Layer w0.2: C18.1 19.447,19.072 RJ1.2
  Top Layer w0.25: U1.8 12,13.182 13.327,11.855 13.375,11.855 C7.1 ; CN2.1 21.34,5.521 22.6,6.781 22.6,11.679 21.655,12.624 21.655,17.905 22,18.25 v2(22,23)
  Top Layer w0.3: C7.1 C8.1 ; C8.1@14.596,11.634 C8.1 ; v1@15.23,11.73 C8.1 ; v1(16.484,14.398) 16.484,18.099 17.25,18.865 17.25,23.132 19.309,25.191 19.954,25.191 v2@19.967,25.178 ; v2(28,31.579) 28.057,31.522 28.204,31.522 28.75,30.976 U6.5
  Top Layer w0.4: U3.3 U3.3@18.675,21.7 ; C18.1 19.316,21.174 18.802,21.688 19.499,22.384 C19.1 19.629,24.28 19.629,24.84 v2@19.967,25.178 ; v2(20.014,25.248) 19.967,25.201 v2@19.967,25.178 ; v2(27.5,26.855) 27.55,26.805 C27.1 C28.1 27.55,25.331 27.5,25.281 27.475,25.281 27.372,25.178 v2@19.967,25.178
  Bottom Layer w0.25: v2(20.014,25.248) 20.014,24.986 v2(22,23)
  Bottom Layer w0.3: v1(15.415,11.679) 15.496,11.679 15.75,11.933 15.792,11.933 16.484,12.626 v1(16.484,14.398)
  Bottom Layer w0.4: v2(27.5,26.855) 27.5,31.079 v2(28,31.579)
BRAKE: U1.12 U9.1 | length 20.7
  Top Layer w0.254: U1.12 14,13.941 14.002,13.939 15.088,13.939 v2(15.2,13.828)
  Top Layer w0.3: v2(23.4,5.4) 23.465,5.335 25.81,5.335 U9.1
  Bottom Layer w0.3: v2(15.2,13.828) 14.82,13.828 13.8,12.808 13.8,9.413 15.505,7.708 21.092,7.708 v2(23.4,5.4)
CAN_N: CN3.2 CN4.2 R3.1 U2.6 | length 18.8
  Top Layer w0.381: CN3.2 8.239,35.149 13.389,35.149 CN4.2 14.891,34.746 15.773,34.746 16.369,34.151 16.369,29.912 14.29,27.832 13.488,27.832 13.264,27.609 13.264,27.574 13.205,27.515 U2.6
CAN_P: CN3.1 CN4.1 R3.2 U2.7 | length 17.1
  Top Layer w0.381: CN3.1 7.944,32.904 7.944,33.194 8.498,33.749 R3.2 13.349,33.749 CN4.1 14.891,34.111 15.51,34.111 15.734,33.888 15.734,30.175 14.026,28.467 13.488,28.467 13.264,28.691 13.264,28.725 13.205,28.785 U2.7
CAN_RX: U1.33 U2.4 | length 5.6
  Top Layer w0.2: U2.4 9,26.245 10,25.245 10,22.641 U1.33
CAN_TX: U1.32 U2.1 | length 9.9
  Top Layer w0.2: U2.1 9.445,30.055 10.5,29 U1.32
ENCODER_A: CN5.4 U1.38 | length 5.1
  Top Layer w0.2: CN5.4@2.04,20.75 U1.38
ENCODER_B: CN5.3 U1.39 | length 4.9
  Top Layer w0.2: CN5.3@2.788,18.957 3.444,18.957 4.736,20.25 U1.39
ENCODER_INDEX: CN5.2 U1.40 | length 7.3
  Top Layer w0.2: CN5.2@1.213,16.417 3.029,16.417 6.361,19.75 U1.40
GND: C1.1 C2.1 C3.1 C4.1 C5.1 C6.1 C9.1 C10.1 C11.1 C12.1 C13.1 C21.1 C22.1 C23.2 C24.1 CN1.1 CN5.1 GND.1@1.5,2 R2.1 R15.1 RJ1.1 U1.23 U1.35 U1.47 U2.2 U4.2 U7.2 U7.8 Y1.2 Y1.4 | length 7.1
  Top Layer w0.2: v1(19.44,16.935) 19.447,16.942 RJ1.1
  Top Layer w0.254: GND.1@1.5,2 2.777,3.277 2.777,3.777 3.225,4.225 C24.1 6.475,4.225 6.5,4.25 C23.2
  Top Layer w0.35: C21.1 C21.1@20.112,8.302
  other v1: 17.25,17.348 22.65,18.702 6.017,23.1
  other v2: 4.6,0.6 7.6,0.6 10.6,0.6 13.6,0.6 9.1,3.6 15.1,3.6 1.6,6.6 10.6,6.6 13.6,6.6 6.1,9.6 24.1,9.6 10.6,18.6 24.1,21.6 13.6,24.6 9.1,27.6 10.6,30.6 6.1,33.6 18.1,33.6 21.1,33.6
MCU_RST: C9.2 R1.1 U1.7 | length 8.2
  Top Layer w0.254: C9.2 6.406,11.9 6.406,12.994 R1.1 6.4,13.05 7.44,14.089 7.44,14.491 8.276,15.327 11.224,15.327 11.498,15.053 11.498,14.377 U1.7
MOTA_H: U1.29 U7.3 | length 21.7
  Top Layer w0.2: U1.29 v2(12,24.5)
  Top Layer w0.4: v2@22.457,17.155 22.484,17.127 24.222,17.127 U7.3
  Bottom Layer w0.3: v2(12,24.5) 11.5,24 11.5,19.21 14.48,16.231 21.451,16.231 22.321,17.1 v2(22.402,17.1)
MOTA_L: U1.26 U7.4 | length 18.3
  Top Layer w0.2: v2(12.75,16.75) 13.605,17.605 13.605,21.488 13.5,21.593 U1.26
  Top Layer w0.4: v2(22.5,15.976) 24.159,15.976 U7.4
  Bottom Layer w0.3: v2(12.75,16.75) 13.769,15.731 21.658,15.731 21.847,15.919 22.443,15.919 v2(22.5,15.976)
MOTB_H: U1.30 U7.5 | length 20.6
  Top Layer w0.2: v2(10.75,16.75) 11.5,17.5 U1.30
  Top Layer w0.4: v2(22.442,14.615) U7.5
  Bottom Layer w0.3: v2(10.75,16.75) 12.3,15.2 21.857,15.2 v2(22.442,14.615)
MOTB_L: U1.27 U7.6 | length 19.4
  Top Layer w0.2: v2@12.976,20.743 U1.27@12.976,22.563
  Top Layer w0.4: v2(22.514,13.345) U7.6
  Bottom Layer w0.3: v2@13.053,20.724 15.778,18 22.421,18 23.3,17.121 23.3,14.131 v2(22.514,13.345)
  other v2: 12.951,20.743
MOTOR_A: D5.1 D5.2 D6.3 MOT_A.1 Q2.1 Q2.5 Q2.6 R10.1 | length 0.5
  Top Layer w0.254: Q2.1@54.4,26.512 54.595,26.708 Q2.1
MOTOR_B: MOT_B.1 U6.3 U6.4
  other v1: 35.4,29.488 36,29.488 30,29.5 31.7,29.5 32.5,29.5 35.4,30.088 36,30.088 32.5,30.3 30,30.361 30.875,30.361 31.7,30.338 35.4,30.688 36,30.688 31.7,31.1 32.5,31.1 35.4,31.288 36,31.288 35.4,31.888 36,31.888 35.4,32.488 36,32.488 35.4,33.088 36,33.088 35.4,33.688 36,33.688
NetC12_2: C12.2 U1.6 Y1.1 | length 4.1
  Top Layer w0.254: U1.6 11.002,14.373 11.002,12.299 C12.2 ; C12.2@11.214,12.333 C12.2 ; Y1.1 11.642,10.805 11.169,11.278 11.169,12.132 C12.2
NetC13_2: C13.2 U1.5 Y1.3 | length 6.1
  Top Layer w0.254: Y1.3 9.669,9.205 10.581,10.117 10.581,11.634 10.03,12.185 C13.2 10.03,12.235 10.5,12.705 U1.5
NetC26_1: C26.1 U5.6 | length 5.4
  Top Layer w0.4: C26.1@41.65,16.572 41.65,13.393 42.403,12.64 U5.6
NetC26_2: C26.2 D1.1 U5.8
NetC30_1: C30.1 U8.6 | length 5.5
  Top Layer w0.4: C30.1@41.65,25.476 41.65,22.17 42.224,21.596 43.525,21.596 U8.6
NetC30_2: C30.2 D4.1 U8.8
NetD1_2: D1.2 R4.2 | length 1.5
  Top Layer w0.4: R4.2 40.23,18.075 41.335,18.075 D1.2
NetD2_1: D2.1 D2.2 D3.3 Q1.1 Q1.5 Q1.6 R5.1 U6.1 U6.2
  other v1: 54.75,14.3 55.621,14.3 54.75,15.1 55.621,15.1 54.75,15.9 55.621,15.9 49.2,16.25 50.071,16.25 51,16.25 51.871,16.25 54.75,16.7 55.621,16.7 49.2,17.05 50.071,17.05 51,17.05 51.871,17.05 49.2,17.85 50.071,17.85 51,17.85 51.871,17.85 59.453,18.388 60.215,18.388 62.5,18.388 49.2,18.65 50.071,18.65 51,18.65 51.871,18.65 59.453,19.175 60.215,19.175 62.5,19.175 59.453,19.963 60.215,19.963 62.5,19.963 60.215,20.75 60.977,20.75 61.738,20.75 62.5,20.75 35.166,24.105 35.766,24.105 35.166,24.705 35.766,24.705 35.166,25.305 35.766,25.305 35.166,25.905 35.766,25.905 35.166,26.505 35.766,26.505 31.7,26.797 32.5,26.797 35.166,27.105 35.766,27.105 32.5,27.6 31.7,27.64 30,27.65 30.875,27.65 35.166,27.705 35.766,27.705 35.166,28.305 35.766,28.305 30,28.5 31.7,28.5 32.5,28.5
NetD4_2: D4.2 R9.2 | length 1.4
  Top Layer w0.4: R9.2 40.23,27.03 41.294,27.03 D4.2
NetPTH11_1: BRAKE-.1 Q3.5 Q3.6 Q3.7 Q3.8
NetQ1_2: Q1.2 R5.2 R6.2 | length 19
  Top Layer w0.4: R6.2 45.45,18.663 47.949,21.162 49.262,21.162 v2(49.3,21.2) ; Q1.2 57.192,18.883 57.192,20.323 R5.2 57.38,20.51 57.38,21.251 57.455,21.326 v2(57.455,21.38)
  Bottom Layer w0.4: v2(49.3,21.2) 57.22,21.2 57.401,21.38 v2(57.455,21.38)
NetQ1_4: Q1.4 R7.2 R8.2 | length 16.9
  Top Layer w0.4: R7.2 46.213,12.963 47.045,13.795 47.045,19.287 48.204,20.446 54.251,20.446 54.595,20.102 Q1.4
NetQ2_2: Q2.2 R10.2 R11.2 | length 12.7
  Top Layer w0.254: Q2.2@55.865,26.38 Q2.2
  Top Layer w0.4: R11.2 47.22,24.114 47.66,24.554 53.177,24.554 53.808,23.924 53.907,23.924 55.865,25.882 Q2.2@55.865,26.38
NetQ2_4: Q2.4 R12.2 R13.2 | length 17.5
  Top Layer w0.4: R12.2 46.43,21.68 48.55,23.8 v2(49.021,23.8) ; Q2.4 R13.2 58.405,25.248 v2(59.148,25.248)
  Bottom Layer w0.4: v2(49.021,23.8) 57.646,23.8 59.094,25.248 v2(59.148,25.248)
NetQ3_4: Q3.4 R14.2 R16.2
NetR2_2: R2.2 U1.44 | length 9
  Top Layer w0.2: R2.2 7.5,22.3 8.63,21.17 8.63,17.867 8.513,17.75 U1.44
NetR6_1: R6.1 U5.7 | length 1.9
  Top Layer w0.4: U5.7 43.625,13.96 45.36,13.96 R6.1
NetR7_1: R7.1 U5.5 | length 2
  Top Layer w0.4: U5.5 45.257,11.37 R7.1
NetR11_1: R11.1 U8.7 | length 2
  Top Layer w0.4: U8.7 43.625,22.766 45.446,22.766 R11.1
NetR12_1: R12.1 U8.5 | length 1.9
  Top Layer w0.4: U8.5 43.577,20.278 45.498,20.278 R12.1
NetR14_1: R14.1 U9.3 | length 86.5
  Top Layer w0.4: U9.3@32.575,2.73 v2(33.5,2.73) ; R14.1 74.23,35.295 75.105,35.295 75.8,34.6 v2(75.8,33.4)
  Bottom Layer w0.4: v2(33.5,2.73) 35.03,1.2 77.8,1.2 80.5,3.9 80.5,32.4 79.5,33.4 v2(75.8,33.4)
NetR15_2: R15.2 U9.2 | length 2.2
  Top Layer w0.254: R15.2 23.848,2.631 25.776,2.631 U9.2
NetU5_2: U5.2 U7.12 | length 5
  Top Layer w0.4: U7.12 36,14.615 36.705,13.91 U5.2
NetU5_3: U5.3 U7.11 | length 5
  Top Layer w0.4: U7.11 35.63,13.345 36.335,12.64 U5.3 U5.3@38.465,12.68
NetU7_13: U7.13 U8.3 | length 10.6
  Top Layer w0.4: U7.13@34.55,15.885 U7.13 33.773,15.862 v2(35.191,15.862) ; v2(37.1,21.5) 37.123,21.523 38.402,21.523 U8.3 U8.3@37.825,21.546
  Bottom Layer w0.4: v2(35.191,15.862) 36.096,16.767 36.096,20.496 v2(37.1,21.5)
NetU7_14: U7.14 U8.2 | length 9.2
  Top Layer w0.4: U7.14 33.801,17.206 35.262,17.206 v2(35.3,17.245) ; v2(37.116,22.816) U8.2
  Bottom Layer w0.4: v2(35.3,17.245) 35.3,21 v2(37.116,22.816)
PGND: C14.1 C15.2 C16.1 C17.2 C20.1 C25.1 C29.1 D3.1 D3.2 D6.1 D6.2 GND.1@84.119,29.25 Q1.3 Q2.3 Q3.1 Q3.2 Q3.3 R8.1 R13.1 R16.1 U5.4 U7.9 U7.15 U8.4 | length 23.6
  Top Layer w0.254: Q2.3@57.135,26.65 Q2.3 ; D6.2@63.39,26.28 D6.2@63.492,26.382
  Top Layer w0.4: U7.9 34.475,10.805 34.6,10.68 34.689,10.769 v2(35.262,10.769) ; U8.4@37.825,20.276 U8.4 ; v2(38.3,10.478) 38.3,11.32 38.35,11.37 U5.4 ; C29.1 38.67,27.397 40.673,29.4 v2(40.679,29.4)
  Bottom Layer w0.4: v2(40.679,29.4) 47.579,22.5 v2(54.665,22.5)
  other v1: 82.329,24.105 83.2,24.105 84.119,24.126 84.99,24.126 82.329,24.905 83.2,24.905 84.119,24.926 84.99,24.926 82.329,25.705 83.2,25.705 84.119,25.726 84.99,25.726 82.329,26.505 83.2,26.505 84.119,26.526 84.99,26.526
  other v2: 44.6,8.4 45.25,8.4 45.25,9.191 46,9.191 38.3,19.256 39,19.25
POT_MID: CN2.2 U1.10 | length 18.2
  Top Layer w0.2: U1.10@13,14.623 13,15.442 13.139,15.581 14.371,15.581 15.854,14.098 15.854,13.35 16.789,12.415 16.789,5.648 18.8,3.637 CN2.2
  Top Layer w0.254: U1.10 U1.10@13,14.623
SWCLK: CN1.2 U1.37 | length 12.2
  Top Layer w0.2: CN1.2 4,27.75 4,21.735 4.485,21.25 U1.37
SWDIO: CN1.3 U1.34 | length 16
  Top Layer w0.2: v2(8.75,24.25) 9.475,23.525 9.475,22.65 U1.34
  Bottom Layer w0.3: CN1.3 3.71,32.29 4.25,31.75 4.25,24.951 4.951,24.25 v2(8.75,24.25)
VCC3: C1.2 C2.2 C3.2 C4.2 C5.2 C6.2 C10.2 C11.2 C18.2 C22.2 CN1.4 R1.2 U1.1 U1.24 U1.36 U1.48 U2.3 U3.1 U4.5 U7.1 | length 93.8
  Top Layer w0.2: C18.2 C18.2@20.716,19.223
  Top Layer w0.25: 8.5,13.675 U1.1
  Top Layer w0.254: CN1.4 2.27,34.56 3.062,34.56 3.914,33.708 3.914,28.525 4.739,27.7 C11.2 ; R1.2 R1.2@5,13.05 ; v2(5.354,25.702) v2@5.354,25.621 ; v2(5.562,14.373) 5,13.811 R1.2@5,13.05 ; U1.48 7.123,15.748 4.628,15.748 C1.2 4.515,13.534 R1.2@5,13.05 ; U2.3 7.387,27.583 5.906,27.583 C10.2 C11.2 ; v2(7.7,12.6) 7.7,12.875 8.5,13.675 ; U1.36 8.5,23.059 8.498,23.06 7.965,23.06 7.2,23.825 C5.2 C6.2 7.2,25.038 6.617,25.621 v2@5.354,25.621 ; v2(15.25,26.25) 15.383,26.117 C3.2 C4.2 15.383,21.252 15.381,21.25 U1.24 ; U3.1 20.733,20.733 20.733,19.372 C18.2@20.799,19.306 ; C11.2 4.79,26.478 5.268,26 5.268,25.707 v2@5.354,25.621
  Top Layer w0.35: v2(13.5,8.6) 13.765,8.6 v2(15.415,10.25) ; v1(18.29,19.115) 18.29,16.994 19.44,15.844 ; U4.5 18.65,12.675 19.264,13.289 19.264,14.145 19.349,14.23 C22.2 19.44,14.591 19.44,15.844 ; C22.2@19.44,14.139 19.554,14.025 20.147,14.025 20.432,13.74 v2(20.5,13.74) ; C18.2@20.847,19.209 20.675,19.036 20.675,17.079 19.44,15.844 ; v2(22.744,19.672) 24.227,19.672 U7.1
  Bottom Layer w0.3: v2(5.354,25.702) 5.902,26.25 v2(15.25,26.25) 15.25,21.845 17.98,19.115 v1(18.29,19.115)
  Bottom Layer w0.35: v2(5.562,14.373) 7.335,12.6 v2(7.7,12.6) 7.7,9.4 8.5,8.6 v2(13.5,8.6) ; v2(15.415,10.25) 18.905,13.74 v2(20.5,13.74) ; v1(18.29,19.115) 18.847,19.672 v2(22.744,19.672)
VCC5: +5V.1@1.5,9 C21.2 C23.1 C24.2 CN5.5 U4.1 U4.3 | length 51.5
  Top Layer w0.35: +5V.1@1.5,9 2.075,8.425 2.075,7.2 2.525,6.75 3.475,6.75 C24.2 8.58,6.775 11.105,4.25 C23.1 12.705,4.25 13.952,5.497 v2(14.28,5.497) ; U4.1@18.617,9.905 18.617,8.597 18.322,8.302 C21.2 18.322,7.762 19.535,6.549 v2(21,6.549) ; U4.1 18.65,10.088 18.55,10.188 18.676,10.188 v2(18.676,10.7) ; U4.3 20.55,9.987 20.65,9.887 21.512,9.887 v2(21.625,9.775)
  Bottom Layer w0.35: +5V.1@1.5,9 2.125,9.625 3.025,9.625 4.4,11 4.4,21.648 3.525,22.523 2.773,22.523 2.75,22.5 CN5.5 ; v2(14.28,5.497) 20.037,5.497 21,6.46 v2(21,6.549) ; v2(18.676,10.7) 20.632,10.7 21.557,9.775 v2(21.625,9.775)
VCC5P: +5V.1@37.75,3 U7.10 U7.16 U9.4 | length 27
  Top Layer w0.4: U9.4 35.48,5.27 ; U7.10 v1(35.4,12.075) 35.675,12.075 36.016,11.734 36.016,5.806 35.48,5.27 ; U7.16 33.752,19.697 36.848,19.697 v1(36.85,19.7) ; +5V.1@37.75,3 35.48,5.27
  Bottom Layer w0.4: v1(35.4,12.075) 36.85,13.525 v1(36.85,19.7)
VCC15: +15V.1 C20.2 C25.2 C29.2 R4.1 R9.1 U5.1 U8.1 | length 4.4
  Bottom Layer w0.4: v2(40.1,15.463) 40.4,15.763 v2(40.4,19.75)
VCC24: +24V.1 BRAKE+.1 C14.2 C15.1
  other v1: 77,34.7 77,35.5 77,36.267
VIN48: +48V.1 C16.2 C17.1 D2.3 D5.3 Q1.7 Q1.8 Q2.7 Q2.8 | length 0.8
  Top Layer w0.254: v1@54.665,30.825 55.215,30.275
  other v1: 73.85,5.5 74.65,5.5 75.45,5.5 76.25,5.5 73.85,6.371 74.65,6.371 75.45,6.371 76.25,6.371 82.25,7.25 83.121,7.25 84,7.277 84.871,7.277 82.25,8.05 83.121,8.05 84,8.077 84.871,8.077 82.25,8.85 83.121,8.85 84,8.877 84.871,8.877 82.25,9.65 83.121,9.65 74.729,9.675 75.6,9.675 76.879,9.675 77.75,9.675 84,9.677 84.871,9.677 74.729,10.475 75.6,10.475 76.879,10.475 77.75,10.475 74.729,11.275 75.6,11.275 76.879,11.275 77.75,11.275 74.729,12.075 75.6,12.075 76.879,12.075 77.75,12.075 61.005,13.5 61.876,13.5 63.25,13.5 64.121,13.5 61.005,14.3 61.876,14.3 63.25,14.3 64.121,14.3 57.415,14.373 58.286,14.373 73.85,14.7 74.65,14.7 75.45,14.7 76.25,14.7 61.005,15.1 61.876,15.1 63.25,15.1 64.121,15.1 57.415,15.173 58.286,15.173 73.85,15.571 74.65,15.571 75.45,15.571 76.25,15.571 61.005,15.9 61.876,15.9 63.25,15.9 64.121,15.9 57.415,15.973 58.286,15.973 57.415,16.773 58.286,16.773 54.8,29 55.671,29 51.25,29.488 52.121,29.488 48.75,29.5 49.621,29.5 54.8,29.8 55.671,29.8 48.75,30.3 49.621,30.3 51.25,30.288 52.121,30.288 54.8,30.6 55.671,30.6 51.25,31.088 52.121,31.088 48.75,31.1 49.621,31.1 54.8,31.4 55.671,31.4 48.75,31.9 49.621,31.9 51.25,31.888 52.121,31.888
VREF3: C7.2 C8.2 C19.2 C27.2 C28.2 CN2.3 U1.9 U3.2 U6.12 | length 50
  Top Layer w0.2: U3.2 20.75,21.895 21.45,21.195 21.45,18.301 21.2,18.051 v1(21.2,11.522)
  Top Layer w0.254: U1.9 12.502,14.373 12.502,13.628 13.352,12.778 13.352,12.753 13.475,12.63 C7.2 C8.2 15.541,12.63 16.096,12.075 16.096,1.87 CN2.3
  Top Layer w0.3: C27.2 28.45,26.282 28.75,26.582 U6.12
  Top Layer w0.4: U3.2 20.824,22.724 20.824,24.076 C19.2 27.398,24.15 28.4,25.152 28.4,25.306 C28.2 C27.2
  Bottom Layer w0.2: v1(15.5,12.637) 15.448,12.637 14.56,11.749 14.56,9.895 15.255,9.2 15.883,9.2 18.205,11.522 v1(21.2,11.522)
pads on no net: U1.2 U1.3 U1.4 U1.11 U1.13 U1.14 U1.15 U1.16 U1.17 U1.18 U1.20 U1.21 U1.22 U1.25 U1.28 U1.31 U1.41 U1.42 U1.43 U1.45 U1.46 U2.5 U2.8 U4.4 U6.6 U6.7 U6.8 U6.9 U6.10 U7.7

## Polygon pours and split planes (outlines as drawn)
GND on Top Layer "GND_L01_P004" (solid, pour order 4): 1.5,37.25 0,35.75 0,1.25 1.25,0 23.25,0 24.5,1.25 24.5,36 23.2,37.25
no net on Top Layer "NONET_L01_P008" (solid, pour order 8): 41,37.25
MOTOR_B on Top Layer "MOTOR_B_L01_P010" (solid, pour order 10): 40.946,36.625 41.5,36.071 41.5,32 40,30.5 37.5,30.5 36.1,29.1 29.7,29.1 29.6,29.2 29.6,30.55 35.675,36.625
NetPTH11_1 on Top Layer "NONET_L01_P-001" (solid, pour order 18): 71.25,28.897 70.657,28.305 66.372,28.305 66,28.677 66,36.25 66.717,36.967 68.793,36.967 69.493,36.267 69.493,34.695 71.25,32.938
VCC15 on Top Layer "NONET_L01_P-001" (solid, pour order 20): 37.675,23.8 37.5,23.975 37.5,25.709 37.791,26 40.282,26 41.1,25.182 41.1,19.4 40.971,19.271 39.829,19.271 39.7,19.4 39.7,23.354 39.254,23.8
VCC15 on Top Layer "NONET_L01_P-001" (solid, pour order 22): 39.3,14.5 37.947,14.5 37.4,15.047 37.4,16.7 37.948,17.248 39.279,17.245 39.523,17 40.528,17 40.836,16.693 40.836,9.114 43,6.95 43,1.2 42.7,0.9 40.506,0.9 39.7,1.706 39.7,14.1
MOTOR_A on Top Layer "NONET_L01_P-001" (solid, pour order 24): 48.2,24.7 53.6,24.7 54,25.1 55,26.1 55.215,26.315 55.215,27.712 55.027,27.9 47.968,27.9 47.503,28.365 47.503,33.503 48.25,34.25 55.8,34.25 56.5,33.55 56.5,28.571 57.061,28.175 64.792,28.175 65.2,28.665 65.274,35.774 64.275,36.772 42.75,36.75 42.25,36.25 42.25,28.75 42.5,28.5 44.4,28.5
NetD2_1 on Top Layer "NETD2_1_L01_P026" (solid, pour order 26): 29.7,28.9 29.6,28.8 29.6,27.476 33.356,23.72 36.02,23.72 36.4,24.1 36.4,28.2 35.7,28.9
PGND on Top Layer "NONET_L01_P-001" (solid, pour order 30): 33.801,18.137 36.338,18.137 36.914,17.561 39.148,17.561 39.401,17.814 39.4,20.603 39.26,20.743 37.5,20.743 37.5,19.463 36.725,18.687 33.801,18.688
NetC26_2 on Top Layer "NONET_L01_P-001" (solid, pour order 32): 42.583,18.796 42.224,18.437 42.224,15.473 42.803,14.894 44.394,14.894 44.875,15.375 44.875,18.675 44.754,18.796
NetC30_2 on Top Layer "NONET_L01_P-001" (solid, pour order 34): 42.619,27.75 42.403,27.534 42.403,24.087 42.7,23.789 44.389,23.789 44.875,24.275 44.875,27.55 44.676,27.75
VCC24 on Top Layer "NONET_L01_P-001" (solid, pour order 40): 81.5,32.5 81.525,32.5 85,32.5 85.7,33.2 85.7,36.8 85.4,37.1 85.3,37 77,37 76.5,36.5 76.5,32.992 77,32.492
VIN48 on Top Layer "NONET_L01_P-001" (solid, pour order 42): 73,17.5 73.5,18 85.25,18 85.75,17.5 85.75,3.5 85.25,3 73.5,3 73,3.5
NetQ3_4 on Top Layer "NONET_L01_P-001" (solid, pour order 46): 71.8,33.4 71.7,33.3 71.7,32.5 71.8,32.4 74.6,32.4 74.775,32.575 74.775,34.325 74.6,34.5 73.7,34.5 73.4,34.2 73.4,33.6 73.2,33.4
NetD2_1 on Top Layer "NONET_L01_P-001" (solid, pour order 48): 57.77,18.3 57.77,18.13 58,17.9 64.6,17.9 65,18.3 65,20.042 63.595,21.447 58.667,21.447 58.2,20.98 58.2,19.9 58.1,19.9 57.8,19.6
PGND on Top Layer "PGND_L01_P052" (solid, pour order 52): 43.9,1 43.4,1.5 43.4,7.868 46.6,11.068 46.6,12.36 48.34,14.1 53,14.1 53.4,13.7 53.4,11.5 54.3,10.6 65.054,10.6 65.6,11.146 65.6,20.45 63.88,22.17 57.124,22.17 56.5,21.546 56.5,18.1 56.35,17.95 55.25,17.95 55.1,18.1 55.1,20.643 54.595,21.148 53.469,21.148 53.243,21.373 53.243,22.369 54.595,23.721 56.4,25.526 56.4,27.5 56.7,27.8 57.415,27.8 57.7,27.515 57.7,24.949 57.949,24.7 59.453,24.7 60,25.247 60,27.075 60.322,27.397 70.197,27.397 71.75,28.954 71.75,31.962 72,32.212 75.6,32.212 75.924,31.888 85.387,31.888 85.8,31.475 85.8,18.9 85.4,18.5 73.088,18.5 72.488,17.9 72.5,17.888 72.5,3.4 70.1,1
GND on Bottom Layer "GND_L02_P006" (solid, pour order 6): 1.5,37.25 0,35.75 0,1.25 1.25,0 23.25,0 24.5,1.25 24.5,36 23.25,37.25
NetD2_1 on Bottom Layer "NONET_L01_P-001" (solid, pour order 12): 29.75,28.9 29.6,28.75 29.6,27.479 33.779,23.3 39.564,23.3 48.264,14.6 52.5,14.6 54.7,12.4 56.2,12.4 56.5,12.7 56.5,17.2 57.1,17.8 64.3,17.8 64.7,18.2 64.7,19.7 62.9,21.5 58.5,21.5 57.8,20.8 52.699,20.8 48.992,20.8 40.892,28.9
VIN48 on Bottom Layer "NONET_L01_P-001" (solid, pour order 28): 48.992,26.6 46.8,28.792 46.8,33.6 47.8,34.6 63.7,34.6 66.8,31.5 78.1,31.5 79.3,30.3 79.3,6.55 78.25,5.5 58.25,5.5 56.8,6.95 56.8,17.1 57.2,17.5 64.4,17.5 65,18.1 65,19.8 58.2,26.6
VCC24 on Bottom Layer "NONET_L01_P-001" (solid, pour order 38): 71,37 70.5,36.5 70.5,34.5 71,34 77,34 77.5,34.5 77.5,36.5 77,37
MOTOR_B on Bottom Layer "MOTOR_B_L02_P050" (solid, pour order 50): 40.917,36.625 41.5,36.042 41.5,32 40,30.5 37.5,30.5 36.1,29.1 29.7,29.1 29.6,29.2 29.6,30.5 35.725,36.625
VIN48 on Bottom Layer "VIN48_L02_P054" (solid, pour order 54): 85.25,3 85.75,3.5 85.75,9.711 85.25,10.211 82.039,10.211 81.5,9.671 81.5,3.25 81.75,3
PGND on Bottom Layer "PGND_L02_P056" (solid, pour order 56): 85.395,23.75 85.895,24.25 85.895,30.461 85.395,30.961 82.184,30.961 81.645,30.421 81.645,24 81.895,23.75
PGND on Bottom Layer "PGND_L02_P058" (solid, pour order 58): 45,7.5 46.5,9 46.5,14.75 40,21.25 37.939,21.25 37.5,20.805 37.5,19.75 37.75,19.5 37.75,12.249 37,11.499 35.249,11.499 34.75,11 34.75,10.25 37.5,7.5

## Silkscreen, mask and mechanical layers (free items; w line width, h text height)
Top Overlay:
  text "L" at 9.5,34.5 h1.75
  text "L" at 16,34.5 h1.75
  text "VCC / SWDIO / SWCLK / GND" at 4,32 h1
  text "P" at 9.58,31.75 h1.75
  text "P" at 16,31.75 h1.75
  text "+5V / ENCA / ENCB / ENCI / GND" at 4.25,18 h1
  text "PM-1 Motor driver" at 46.3,3.75 h4
  text "VCC" at 15.25,3.706 h1.75
  text "GND" at 20.5,3.706 h1.75
  text "BAUMAN ROBOTICS 2019.05" at 46.25,0.5 h4
Mechanical 4 (Mech4):
  lines w0.2: -0.5,-6.5 1,-8 6,-8 7.5,-6.5 7.5,-2 9,-0.5 24,-0.5 26,-2.5 29,-2.5 32,-2.5 34,-0.5 77,-0.5 78.5,-2 78.5,-6.5 80,-8 85,-8 86.5,-6.5 86.5,43.75 85,45.25 80,45.25 78.5,43.75 78.5,39.25 77,37.75 34,37.75 32,39.75 29,39.75 26,39.75 24,37.75 9,37.75 7.5,39.25 7.5,43.75 6,45.25 1,45.25 -0.5,43.75 -0.5,-6.5